# Altium PCB PCB.PcbDoc
Units mil, origin at the board's own origin, x right, y up, seen from the top; angles counter-clockwise.
Board outline 3900 x 3000 mil, 2 copper layers (Top Layer, Bottom Layer); 85 components, 48 nets, 245 pads, 30 vias.
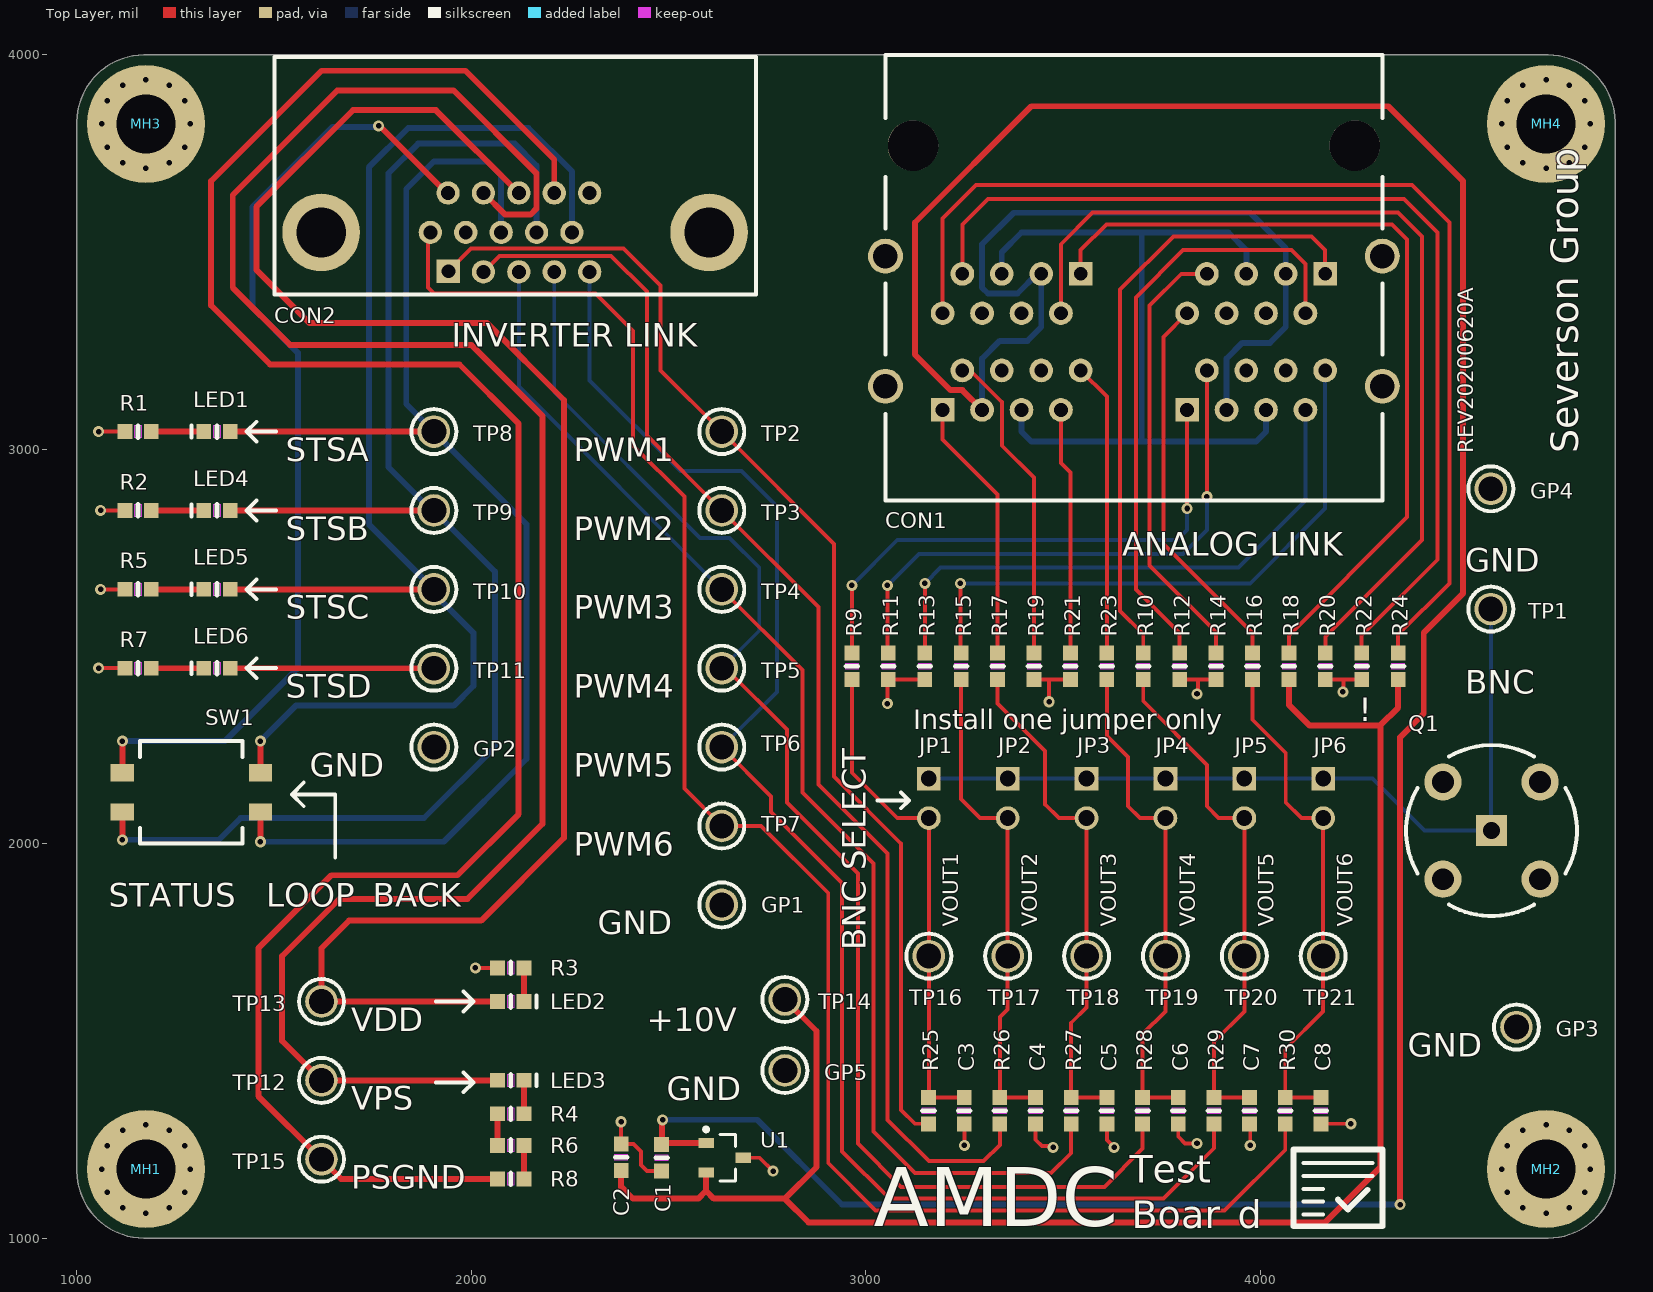
[diagram p0: Top Layer view]
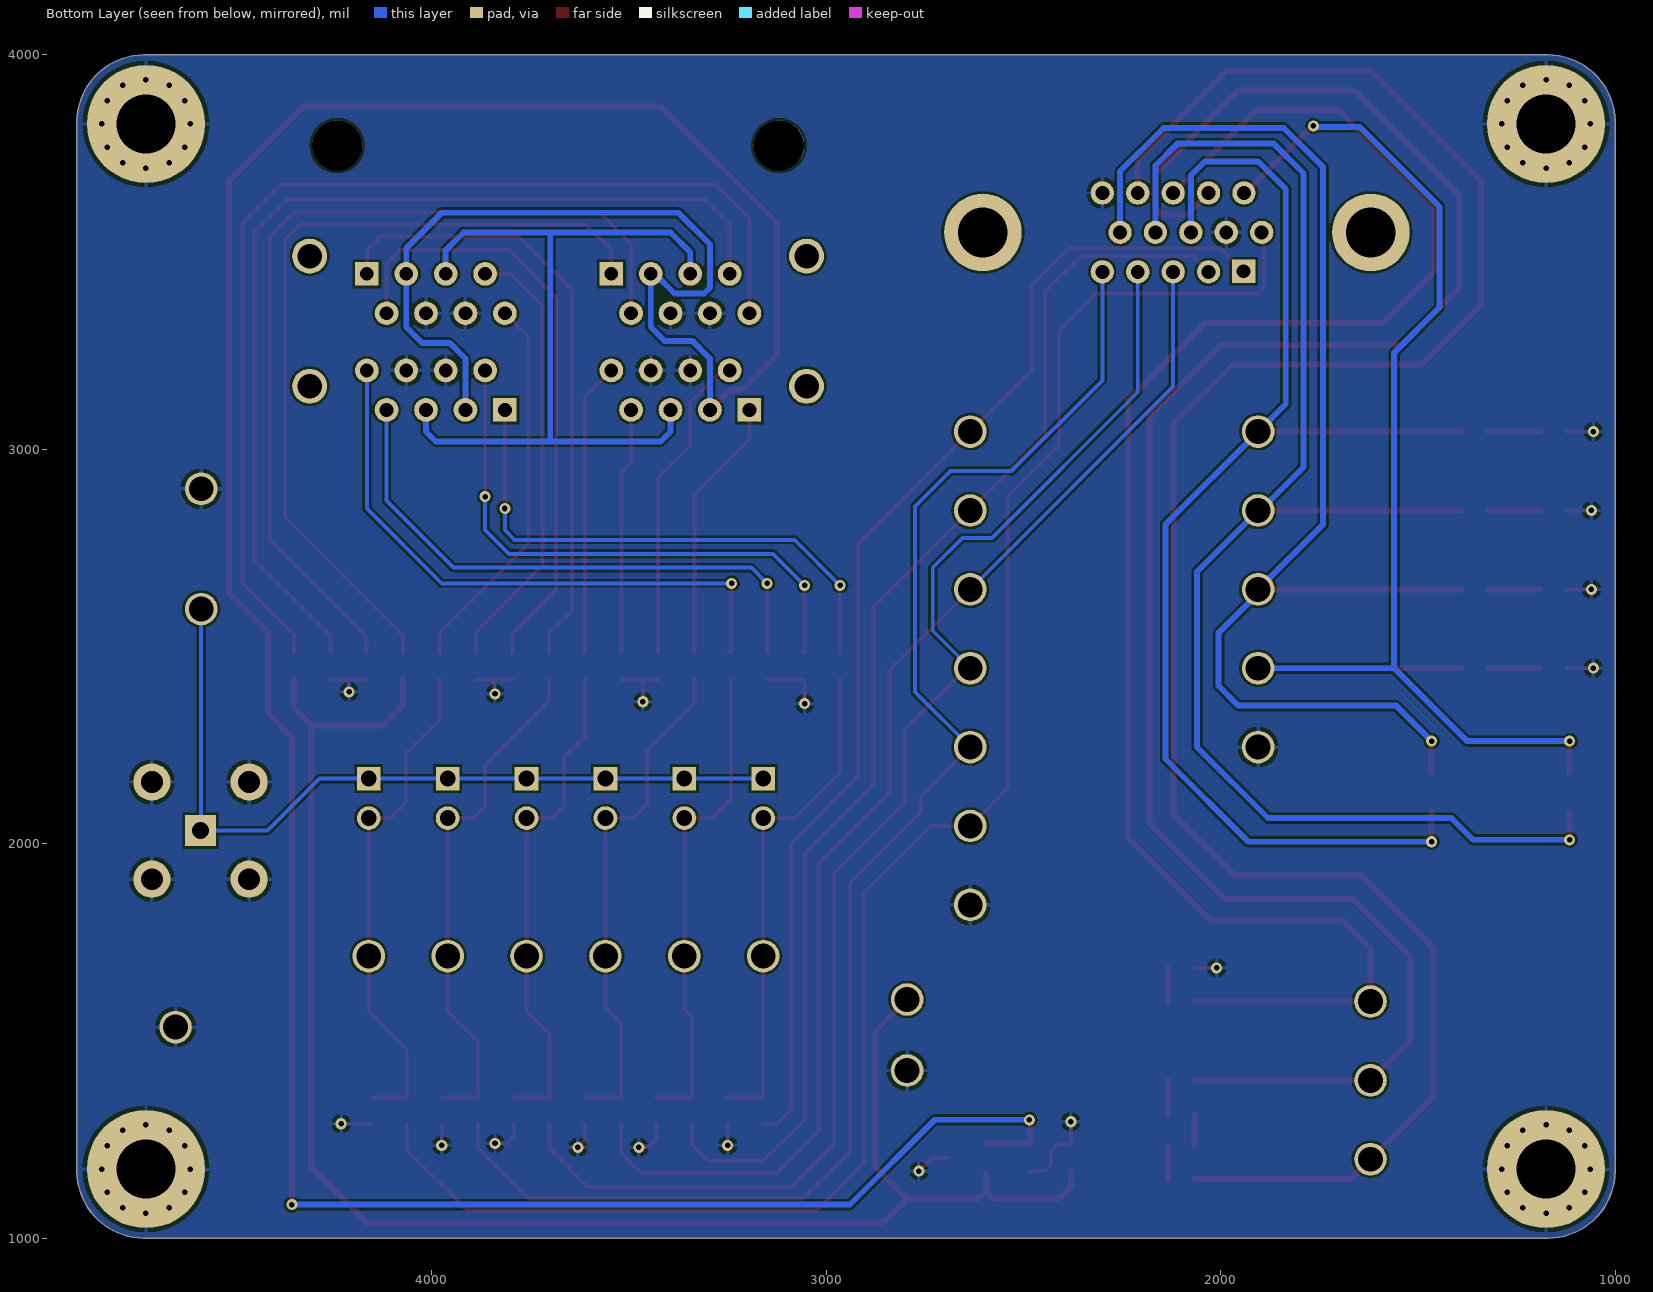
[diagram p1: Bottom Layer view, seen from below]
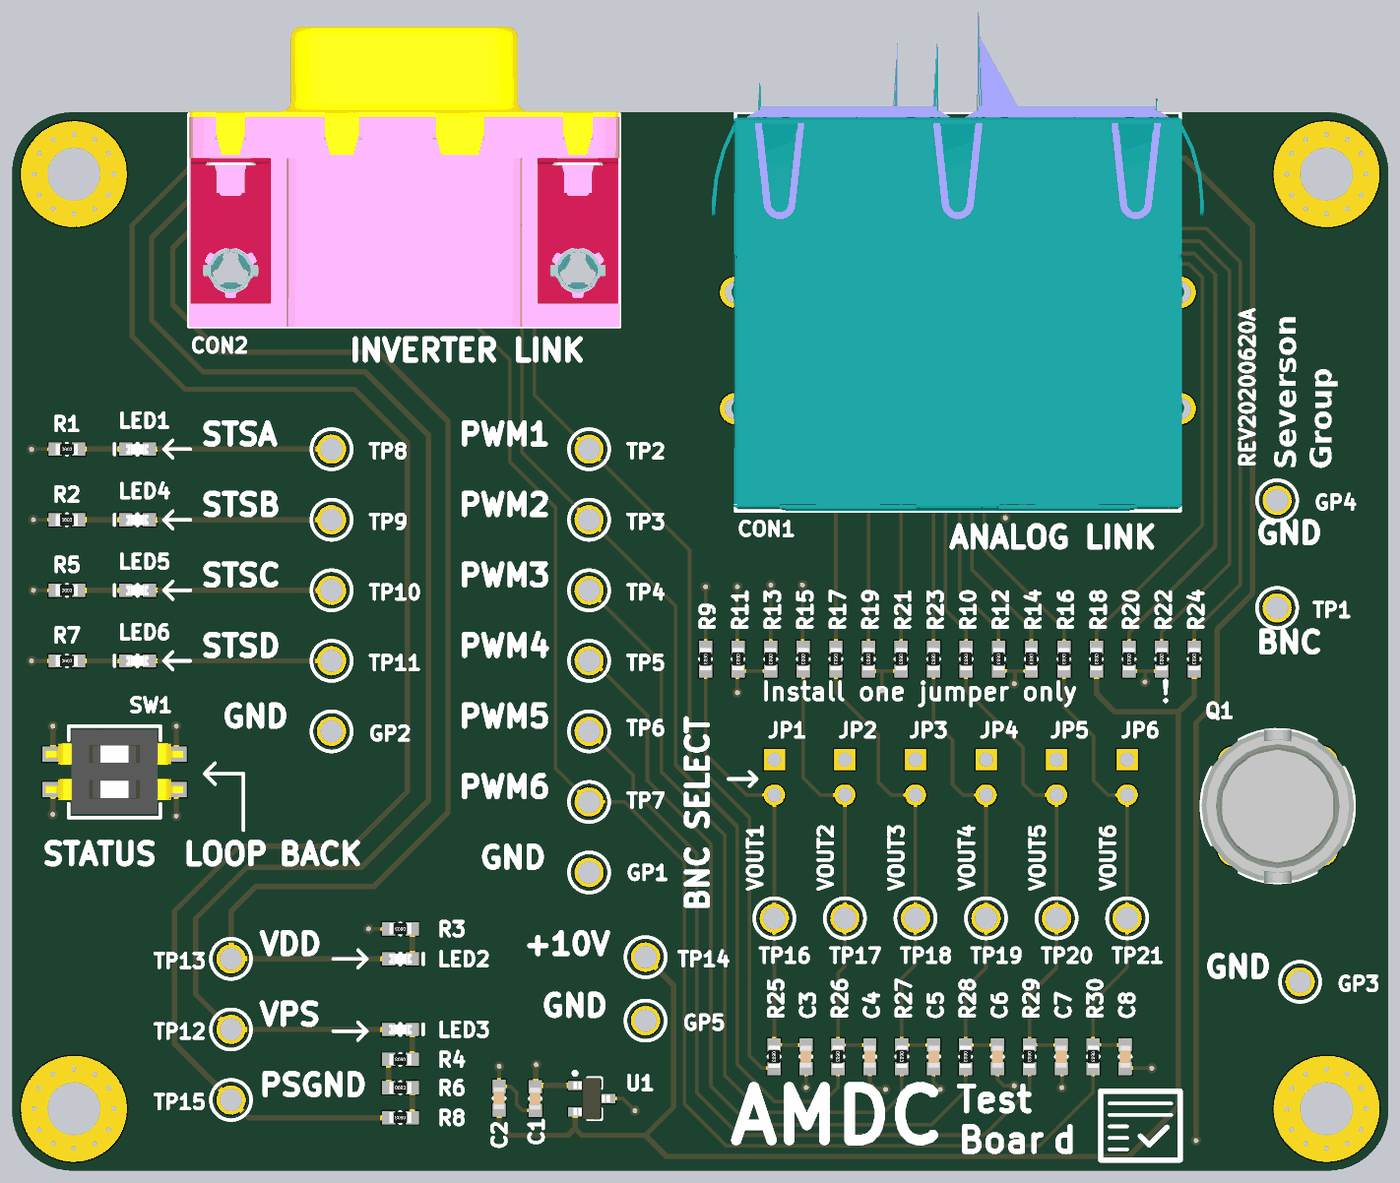
[diagram p2: 3D render of the assembled board from above, using the file's embedded part models]

## Layer stack, top to bottom
Top Solder: solder mask 0.4, Solder Resist, Dk 3.5
Top Layer: signal copper 1.4
Dielectric 1: dielectric 12.6, FR-4, Dk 4.8
Bottom Layer: signal copper 1.4
Bottom Solder: solder mask 0.4, Solder Resist, Dk 3.5

## Board outline
1000,1170 ccw(c1170,1170) 1170,1000 4730,1000 ccw(c4730,1170) 4900,1170 4900,3830 ccw(c4730,3830) 4730,4000 1170,4000 ccw(c1170,3830) 1000,3830

## Design rules (kind name [scope] priority, off if disabled: settings)
Clearance [All] p1: gap=6 ignorepadtopadclearanceinfootprint=FALSE
Height [All] p1: minheight=0 maxheight=2000 prefheight=500
HoleSize [All] p1: absolutevalues=TRUE maxlimit=250 minlimit=14 maxpercent=80.000 minpercent=20.000
PolygonConnect [All] p1: connectstyle=Relief reliefconductorwidth=10 reliefentries=4 polygonreliefangle="90 Angle" airgapwidth=10
RoutingVias [All] p1: holewidth=14 width=28 viastyle="Through Hole" minholewidth=14 minwidth=28 maxholewidth=20 maxwidth=50
SilkToSolderMaskClearance [IsPad] p1: minsilkscreentomaskgap=6 clearancetoexposedcopper=TRUE
SolderMaskExpansion [All] p1: expansion=4
Width [All] p1: maxlimit=200 minlimit=6 preferedwidth=10
27 further rules are at their usual default settings.

## Components (designator, comment, footprint, x,y, rotation, side; value= is the part's Value field where it differs from the comment)
C1 "Capacitor" 0603-CAP 2482.44,1203.8 r270 top value=100n
C2 "Capacitor" 0603-CAP 2380,1205 r90 top value=100n
C3 "Capacitor" 0603-CAP 3249.71,1322.87 r270 top value=100n
C4 "Capacitor" 0603-CAP 3430.62,1322.87 r270 top value=100n
C5 "Capacitor" 0603-CAP 3611.52,1322.87 r270 top value=100n
C6 "Capacitor" 0603-CAP 3792.43,1322.87 r270 top value=100n
C7 "Capacitor" 0603-CAP 3973.34,1322.87 r270 top value=100n
C8 "Capacitor" 0603-CAP 4154.25,1322.87 r270 top value=100n
CON1 "RJSAE538004" RJSAE538004 4240,3770 r180 top locked
CON2 "ICD15S13E6GX00LF" ICD15S13E6GX00LF 2111.22,3550 r180 top locked
GP1 "Test Point" TP_1.6MM 2635,1845 r0 top
GP2 "Test Point" TP_1.6MM 1905,2245 r0 top
GP3 "Test Point" TP_1.6MM 4650,1535 r0 top
GP4 "Test Point" TP_1.6MM 4585,2900 r0 top
GP5 "Test Point" TP_1.6MM 2795,1425 r0 top
JP1 "Jumper2" PIN_HEADER_1x2 3160,2115 r270 top
JP2 "Jumper2" PIN_HEADER_1x2 3360,2115 r270 top
JP3 "Jumper2" PIN_HEADER_1x2 3560,2115 r270 top
JP4 "Jumper2" PIN_HEADER_1x2 3760,2115 r270 top
JP5 "Jumper2" PIN_HEADER_1x2 3960,2115 r270 top
JP6 "Jumper2" PIN_HEADER_1x2 4160,2115 r270 top
LED1 "LED" 0603-LED 1355,3045 r0 top value=RED
LED2 "LED" 0603-LED 2100,1600 r180 top value=GREEN
LED3 "LED" 0603-LED 2100,1400 r180 top value=RED
LED4 "LED" 0603-LED 1355,2845 r0 top value=GREEN
LED5 "LED" 0603-LED 1355,2645 r0 top value=YELLOW
LED6 "LED" 0603-LED 1355,2445 r0 top value=BLUE
MH1 "MOUNT_HOLE" MOUNTING_HOLE 1175,1175 r0 top locked
MH2 "MOUNT_HOLE" MOUNTING_HOLE 4725,1175 r0 top locked
MH3 "MOUNT_HOLE" MOUNTING_HOLE 1175,3825 r0 top locked
MH4 "MOUNT_HOLE" MOUNTING_HOLE 4725,3825 r0 top locked
Q1 "5-1634503-1" 5-1634503-1 4586.77,2033.23 r0 top
R1 "Resistor" 0603-RES 1155,3045 r0 top value=470
R2 "Resistor" 0603-RES 1155,2845 r0 top value=470
R3 "Resistor" 0603-RES 2100,1685 r180 top value=470
R4 "Resistor" 0603-RES 2100,1315 r180 top value=470
R5 "Resistor" 0603-RES 1155,2645 r0 top value=470
R6 "Resistor" 0603-RES 2100,1235 r0 top value=470
R7 "Resistor" 0603-RES 1155,2445 r0 top value=470
R8 "Resistor" 0603-RES 2100,1150 r180 top value=470
R9 "Resistor" 0603-RES 2965,2450 r270 top value=0R
R10 "Resistor" 0603-RES 3703.67,2450 r270 top value=0R
R11 "Resistor" 0603-RES 3057.33,2450 r270 top value=0R
R12 "Resistor" 0603-RES 3796,2450 r270 top value=0R
R13 "Resistor" 0603-RES 3149.67,2450 r270 top value=0R
R14 "Resistor" 0603-RES 3888.33,2450 r270 top value=0R
R15 "Resistor" 0603-RES 3242,2450 r270 top value=0R
R16 "Resistor" 0603-RES 3980.67,2450 r270 top value=0R
R17 "Resistor" 0603-RES 3334.33,2450 r270 top value=0R
R18 "Resistor" 0603-RES 4073,2450 r270 top value=0R
R19 "Resistor" 0603-RES 3426.67,2450 r270 top value=0R
R20 "Resistor" 0603-RES 4165.33,2450 r270 top value=0R
R21 "Resistor" 0603-RES 3519,2450 r270 top value=0R
R22 "Resistor" 0603-RES 4257.67,2450 r270 top value=0R
R23 "Resistor" 0603-RES 3611.33,2450 r270 top value=0R
R24 "Resistor" 0603-RES 4350,2450 r270 top value=0R
R25 "Resistor" 0603-RES 3159.25,1322.87 r270 top value=160
R26 "Resistor" 0603-RES 3340.16,1322.87 r270 top value=160
R27 "Resistor" 0603-RES 3521.07,1322.87 r270 top value=160
R28 "Resistor" 0603-RES 3701.98,1322.87 r270 top value=160
R29 "Resistor" 0603-RES 3882.89,1322.87 r270 top value=160
R30 "Resistor" 0603-RES 4063.8,1322.87 r270 top value=160
SW1 "DS04-254-2-02BK-SMT" DS04-254-2-02BK-SMT 1290,2130 r90 top
TP1 "Test Point" TP_1.6MM 4585,2595 r0 top
TP2 "Test Point" TP_1.6MM 2635,3045 r0 top
TP3 "Test Point" TP_1.6MM 2635,2845 r0 top
TP4 "Test Point" TP_1.6MM 2635,2645 r0 top
TP5 "Test Point" TP_1.6MM 2635,2445 r0 top
TP6 "Test Point" TP_1.6MM 2635,2245 r0 top
TP7 "Test Point" TP_1.6MM 2635,2045 r0 top
TP8 "Test Point" TP_1.6MM 1905,3045 r0 top
TP9 "Test Point" TP_1.6MM 1905,2845 r0 top
TP10 "Test Point" TP_1.6MM 1905,2645 r0 top
TP11 "Test Point" TP_1.6MM 1905,2445 r0 top
TP12 "Test Point" TP_1.6MM 1620,1400 r0 top
TP13 "Test Point" TP_1.6MM 1620,1600 r0 top
TP14 "Test Point" TP_1.6MM 2795,1605 r0 top
TP15 "Test Point" TP_1.6MM 1620,1200 r0 top
TP16 "Test Point" TP_1.6MM 3160,1715 r0 top
TP17 "Test Point" TP_1.6MM 3360,1715 r0 top
TP18 "Test Point" TP_1.6MM 3560,1715 r0 top
TP19 "Test Point" TP_1.6MM 3760,1715 r0 top
TP20 "Test Point" TP_1.6MM 3960,1715 r0 top
TP21 "Test Point" TP_1.6MM 4160,1715 r0 top
U1 "LT1460KCS3-10#TRMPBF" SOT95P237X112-3N 2642.44,1203.8 r0 top

## Footprints (in the part's own frame and the unit in brackets; to place one, negate y for a bottom-side part, rotate by r counter-clockwise, add the part's x,y. Pads: shape width x height; smd on the part's side, far side on the other; paste and mask are expansions set on the pad)
5-1634503-1 [mm] "CONN BNC JACK STR 50 OHM PCB"
  rect 2x2 hole 1.1: 1(0,0)
  round 2.4 hole 1.4: 2(-3.13,-3.13) 2(-3.13,3.13) 2(3.13,-3.13) 2(3.13,3.13)
  silkscreen extent -5.5,-5.5 5.5,5.5, body extent -5.5,-5.51 5.5,5.51, height 13.7
0603-CAP [mm]
  rect 0.95x0.95 smd: 1(-0.85,0) 2(0.85,0)
  Top Layer keep-out region: -0.2,0.4 0.2,0.4 0.2,-0.4 -0.2,-0.4
  silkscreen extent 0,-0.38 0,0.38, body extent -0.8,-0.4 0.8,0.4, height 0.79
0603-LED [mm]
  rect 0.95x0.95 smd: A(0.85,0) C(-0.85,0)
  Top Layer keep-out region: -0.2,0.4 0.2,0.4 0.2,-0.4 -0.2,-0.4
  silkscreen extent -1.65,-0.38 0,0.38, body extent -0.83,-0.37 0.82,0.81, height 0.8
0603-RES [mm]
  rect 0.95x0.95 smd: 1(-0.85,0) 2(0.85,0)
  Top Layer keep-out region: -0.2,0.4 0.2,0.4 0.2,-0.4 -0.2,-0.4
  silkscreen extent 0,-0.38 0,0.38, body extent -0.8,-0.4 0.8,0.4, height 0.44
DS04-254-2-02BK-SMT [mm] "DIP SWITCH, SPST, 2.54 PITCH, FL"
  rect 1.1x1.5 smd: 1(-1.27,-4.45) 2(-1.27,4.45) 3(1.27,-4.45) 4(1.27,4.45)
  silkscreen extent -3.3,-3.3 3.3,3.3, body extent -3.03,-4.95 3.05,4.95, height 3.99
ICD15S13E6GX00LF [mm] "CONN DSUB HD RCPT 15POS R/A SLDR"
  rect 1.5x1.5 hole 0.9: 1(4.305,2.5)
  round 1.5 hole 0.9: 2(2.045,2.54) 3(-0.235,2.54) 4(-2.515,2.54) 5(-4.795,2.54) 6(5.465,0) 7(3.185,0) 8(0.905,0) 9(-1.375,0) 10(-3.655,0) 11(4.325,-2.54) 12(2.045,-2.54) 13(-0.235,-2.54) 14(-2.515,-2.54) 15(-4.795,-2.54)
  round 5 hole 3.2: SH1(12.495,0) SH2(-12.495,0)
  silkscreen extent -15.5,-11.3 15.5,4, body extent -15.5,-17.58 15.5,4, height 12.65
MOUNTING_HOLE [mil]
  round 30 hole 14: 1(-112.5,0) 1(-98.43,-59.06) 1(-98.43,59.06) 1(-59.06,-98.43) 1(-59.06,98.43) 1(0,-112.5) 1(0,112.5) 1(59.06,-98.43) 1(59.06,98.43) 1(98.43,-59.06) 1(98.43,59.06) 1(112.5,0)
  round 300 hole 150: 1(0,0)
PIN_HEADER_1x2 [mil]
  rect 60x60 hole 40.16: 1(-50,0)
  round 60 hole 40.16: 2(50,0)
RJSAE538004 [mil] "CONN MOD JACK 8P8C R/A SHIELDED"
  rect 60x60 hole 35: 1A(425,670) 1B(1045,670) 1C(75,325) 1D(695,325)
  round 60 hole 35: 2A(375,570) 2B(995,570) 2C(125,425) 2D(745,425) 3A(325,670) 3B(945,670) 3C(175,325) 3D(795,325) 4A(275,570) 4B(895,570) 4C(225,425) 4D(845,425) 5A(225,670) 5B(845,670) 5C(275,325) 5D(895,325) 6A(175,570) 6B(795,570) 6C(325,425) 6D(945,425) 7A(125,670) 7B(745,670) 7C(375,325) 7D(995,325) 8A(75,570) 8B(695,570) 8C(425,425) 8D(1045,425)
  round 88.58 hole 62: SH1(-70,610) SH2(-70,280) SH3(1190,610) SH4(1190,280)
  round 127.95 hole 128: ""(0,0) ""(1120,0)
  silkscreen extent -70,-230 1190,900, body extent -137,-450 1257,900, height 1094
SOT95P237X112-3N [mm] "SOT23, 3-Leads, Body 2.92x2.37mm, Pitch 0.95mm, IPC Medium Density"
  rect 1x0.65 smd: 1(-1.2,0.95) 2(-1.2,-0.95) 3(1.2,0)
  silkscreen extent -1.32,-1.5 0.7,1.95, body extent -1.32,-1.52 1.32,1.52, height 1.12
TP_1.6MM [mm]
  round 2.1 hole 1.6: 1(0,0)
  silkscreen extent -1.45,-1.45 1.45,1.45, body extent -1.52,-1.51 1.52,1.53, height 5

## Part data
C1 C2 C3 C4 C5 C6 C7 C8: Supplier Part Number 1=311-1341-1-ND, Supplier 1=Digi-Key
CON1: "CONN MOD JACK 8P8C R/A SHIELDED", Supplier Part Number 1=RJSAE538004-ND, Supplier 1=Digi-Key
CON2: "CONN DSUB HD RCPT 15POS R/A SLDR", Supplier Part Number 1=609-2801-ND, Supplier 1=Digi-Key
GP1 GP2 GP3 GP4 GP5 TP1 TP2 TP3 TP4 TP5 TP6 TP7 TP8 TP9 TP10 TP11 TP12 TP13 TP14 TP15 TP16 TP17 TP18 TP19 TP20 TP21: Supplier Part Number 1=36-5005-ND, Supplier 1=Digi-Key
JP1 JP2 JP3 JP4 JP5 JP6: Supplier Part Number 1=732-5315-ND, Supplier 1=Digi-Key
LED1 LED3: Supplier Part Number 1=732-4978-1-ND, Supplier 1=Digi-Key
LED2 LED4: Supplier Part Number 1=732-4980-1-ND, Supplier 1=Digi-Key
LED5: Supplier Part Number 1=732-4981-1-ND, Supplier 1=Digi-Key
LED6: Supplier Part Number 1=732-4966-1-ND, Supplier 1=Digi-Key
MH1 MH2 MH3 MH4: "MOUNTING HOLE"
Q1: "CONN BNC JACK STR 50 OHM PCB", Supplier Part Number 1=A97581-ND, Supplier 1=Digi-Key
R1 R2 R3 R4 R5 R6 R7 R8: Supplier Part Number 1=311-470GRCT-ND, Supplier 1=Digi-Key
R9 R10 R11 R12 R13 R14 R15 R16 R17 R18 R19 R20 R21 R22 R23 R24: Supplier Part Number 1=311-0.0GRCT-ND, Supplier 1=Digi-Key
R25 R26 R27 R28 R29 R30: Supplier Part Number 1=311-160HRCT-ND, Supplier 1=Digi-Key
SW1: "DIP SWITCH, SPST, 2.54 PITCH, FL", Supplier Part Number 1=2223-DS04-254-2-02BK-SMT-ND, Supplier 1=Digi-Key
U1: "IC VREF SERIES 0.5% SOT23-3", Supplier Part Number 1=LT1460KCS3-10#TRMPBFCT-ND, Supplier 1=Digi-Key

## Via types
v1: diameter 28, hole 14, Top Layer to Bottom Layer, tented both sides, 30 vias

## Nets (pads, with @x,y where several pads share a name; then routed paths per layer and width w, separated by ;. In a path a pad name is that pad's centre, name@x,y a point inside that pad or via, vN(x,y) a via of type N, cw(c..) or ccw(c..) an arc to the next point about the centre after c; other vN are vias at no path point)
10V: C2.1 R18.2 R24.2 TP14.1 U1.2 | length 4269.3
  Top Layer w15: C2.1 2380,1130 2410,1100 2575.39,1100 2595.2,1119.8 ; U1.2 2595.2,1119.8 ; TP14.1 2875,1525 2875,1180 2795,1100 ; R18.2 4073,2352 4125,2300 4305,2300 ; R24.2 4350,2345 4305,2300 ; 2595.2,1119.8 2615,1100 2795,1100 ; 2795,1100 2855,1040 4165,1040 4305,1180 4305,2300
+15V: C1.1 CON1.3A CON1.3B CON1.3C CON1.3D U1.1 | length 9039.2
  Top Layer w15: C1.1 C1.1@2483.72,1238.54 ; v1(2485,1300) 2483.72,1298.72 C1.1@2483.72,1238.54 ; U1.1 2486.38,1241.2 C1.1@2483.72,1238.54 ; CON1.3B 3245,3150 3215,3150 3125,3240 3125,3575 3420,3870 4325,3870 4515,3680 4515,2635 4415,2535 4415,2330 4355,2270 v1(4355,1085)
  Bottom Layer w15: v1(2485,1300) 2725,1300 2940,1085 v1(4355,1085) ; CON1.3B 3295,3230 3340,3275 3410,3275 3445,3310 CON1.3D 3435,3445 3385,3395 3310,3395 3295,3410 3295,3520 3375,3600 3975,3600 4065,3510 CON1.3C 4065,3310 4025,3270 3955,3270 3915,3230 CON1.3A
-15V: CON1.5A CON1.5B CON1.5C CON1.5D | length 2057.1
  Bottom Layer w15: CON1.5D 3345,3500 3395,3550 3700,3550 ; CON1.5B 3395,3045 3420,3020 3705,3020 ; CON1.5C 3965,3505 3920,3550 3700,3550 ; CON1.5A 4015,3045 3990,3020 3705,3020 ; 3700,3550 3700,3025 3705,3020
ANLG_N1: CON1.2A R11.1 | length 1447.7
  Top Layer w10: v1(3055,2655) 3055,2491.13 3060,2486.13 R11.1 ; v1(3865,2880) CON1.2A
  Bottom Layer w10: v1(3055,2655) 3135,2735 3805,2735 3865,2795 v1(3865,2880)
ANLG_N2: CON1.8A R15.1 | length 1533.5
  Top Layer w10: v1(3240,2660) 3240,2491.46 3245,2486.46 R15.1
  Bottom Layer w10: v1(3240,2660) 3975,2660 4165,2850 CON1.8A
ANLG_N3: CON1.2B R19.1 | length 803.5
  Top Layer w10: CON1.2B 3265,3200 3345,3120 3345,3010 3426.67,2928.33 R19.1
ANLG_N4: CON1.8B R23.1 | length 744
  Top Layer w10: CON1.8B 3611.33,3133.67 R23.1
ANLG_N5: CON1.2C R12.1 | length 1566.7
  Top Layer w10: R12.1 3796,2534 3685,2645 3685,3385 3805,3505 4080,3505 4115,3470 CON1.2C
ANLG_N6: CON1.8C R16.1 | length 979.9
  Top Layer w10: CON1.8C 3755,3285 3755,2760 3980.67,2534.33 R16.1
ANLG_N7: CON1.2D R20.1 | length 2305.9
  Top Layer w10: CON1.2D 3495,3520 3575,3600 4350,3600 4410,3540 4410,2770 4165.33,2525.33 R20.1
ANLG_N8: CON1.8D R24.1 | length 2744.9
  Top Layer w10: CON1.8D 3195,3585 3280,3670 4385,3670 4480,3575 4480,2660 4350,2530 R24.1
ANLG_P1: CON1.1A R9.1 | length 1384.5
  Top Layer w10: R9.1 v1(2965,2655) ; v1(3815,2850) CON1.1A
  Bottom Layer w10: v1(2965,2655) 3080,2770 3790,2770 3815,2795 v1(3815,2850)
ANLG_P2: CON1.7A R13.1 | length 1458.7
  Top Layer w10: R13.1 3150,2483.8 v1(3150,2660)
  Bottom Layer w10: v1(3150,2660) 3190,2700 3945,2700 4115,2870 CON1.7A
ANLG_P3: CON1.1B R17.1 | length 674.2
  Top Layer w10: CON1.1B 3195,3025 3334.33,2885.67 R17.1
ANLG_P4: CON1.7B R21.1 | length 626.5
  Top Layer w10: CON1.7B 3495,2965 3519,2941 R21.1
ANLG_P5: CON1.1C R10.1 | length 1596.3
  Top Layer w10: R10.1 3703.67,2531.33 3645,2590 3645,3405 3780,3540 4130,3540 4165,3505 CON1.1C
ANLG_P6: CON1.7C R14.1 | length 1129.4
  Top Layer w10: CON1.7C 3800,3445 3720,3365 3720,2705 3888.33,2536.67 R14.1
ANLG_P7: CON1.1D R18.1 | length 2103.5
  Top Layer w10: CON1.1D 3545,3505 3610,3570 4335,3570 4373,3532 4373,2828 4073,2528 R18.1
ANLG_P8: CON1.7D R22.1 | length 2538.3
  Top Layer w10: CON1.7D 3245,3570 3310,3635 4365,3635 4450,3550 4450,2720 4257.67,2527.67 R22.1
BNC: JP1.1 JP2.1 JP3.1 JP4.1 JP5.1 JP6.1 Q1.1 TP1.1 | length 2043.9
  Bottom Layer w10: JP1.1 JP2.1 JP3.1 JP4.1 JP5.1 JP6.1 4285,2165 4416.77,2033.23 Q1.1 4585,2035 TP1.1
GND: C1.2 C2.2 C3.2 C4.2 C5.2 C6.2 C7.2 C8.2 CON1.4A CON1.4B CON1.4C CON1.4D CON1.6A CON1.6B CON1.6C CON1.6D CON2.7 CON2.15 GP1.1 GP2.1 GP3.1 GP4.1 GP5.1 MH1.1 MH2.1 MH3.1 MH4.1 Q1.2 R1.1 R2.1 R3.2 R5.1 R7.1 R11.2 R12.2 R13.2 R14.2 R19.2 R20.2 R21.2 R22.2 U1.3 | length 1607.6
  Top Layer w10: v1(1055,2445) R7.1 ; v1(1055,3045) R1.1 ; v1(1060,2645) R5.1 ; v1(1060,2845) R2.1 ; v1(2010,1685) R3.2 ; v1(2380,1295) C2.2 2411.54,1238.46 2430,1220 2430,1185.86 2445.52,1170.33 C1.2 C1.2@2480,1167.89 ; U1.3 2731.2,1203.8 v1(2765,1170) ; v1(3055,2355) 3055,2414.2 R11.2 R13.2 ; C3.2 3250,1289.12 v1(3250,1235) ; R19.2@3425,2414.87 R19.2 3465,2416.54 ; C4.2 3430.62,1249.38 3446.56,1233.44 3471.56,1233.44 v1(3475,1230) ; v1(3465,2360) 3465,2416.54 ; R21.2 3465,2416.54 ; C5.2 3611.52,1248.48 v1(3630,1230) ; C6.2 3792.43,1257.57 3810,1240 v1(3840,1240) ; R12.2 3842.17,2416.54 ; v1(3840,2380) 3842.17,2382.17 3842.17,2416.54 ; R14.2@3890,2414.87 R14.2 3842.17,2416.54 ; C7.2 3975,1287.75 v1(3975,1235) ; C8.2 4154.84,1290 v1(4230,1290) ; R20.2@4165,2416.2 R20.2 4211.5,2416.54 ; v1(4210,2385) 4211.5,2386.5 4211.5,2416.54 ; R22.2 4211.5,2416.54
NetLED1_C: LED1.C R1.2 | length 133.1
  Top Layer w15: R1.2 LED1.C
NetLED2_C: LED2.C R3.1 | length 85
  Top Layer w15: LED2.C R3.1
NetLED3_C: LED3.C R4.1 | length 85
  Top Layer w15: R4.1 LED3.C
NetLED4_C: LED4.C R2.2 | length 133.1
  Top Layer w15: R2.2 LED4.C
NetLED5_C: LED5.C R5.2 | length 133.1
  Top Layer w15: R5.2 LED5.C
NetLED6_C: LED6.C R7.2 | length 133.1
  Top Layer w15: R7.2 LED6.C
NetR4_2: R4.2 R6.1 | length 80
  Top Layer w15: R6.1 R4.2
NetR6_2: R6.2 R8.1 | length 85
  Top Layer w15: R8.1 R6.2
PSGND: CON2.14 R8.2 TP15.1 | length 5242.9
  Top Layer w15: R8.2 1670,1150 TP15.1 1460,1360 1460,1735 1645,1920 1965,1920 2120,2075 2120,3065 1970,3215 1490,3215 1340,3365 1340,3680 1620,3960 1985,3960 2210.24,3734.76 CON2.14
PWM1: CON2.1 R25.2 TP2.1 | length 3028
  Top Layer w10: CON2.1 1999.63,3509.47 2385.53,3509.47 2480,3415 2480,3200 TP2.1 2920,2760 2920,2170 3090,2000 3090,1325 3125,1290 3158.66,1290 R25.2
PWM2: CON2.2 R26.2 TP3.1 | length 3220.3
  Top Layer w10: CON2.2 2071.24,3490.53 2354.47,3490.53 2445,3400 2445,3035 TP3.1 2880,2600 2880,2150 3055,1975 3055,1300 3160,1195 3299.14,1195 3340.16,1236.02 R26.2
PWM3: CON2.3 R27.2 TP4.1 | length 3191.7
  Top Layer w10: TP4.1 2840,2440 2840,2130 3020,1950 3020,1270 3125,1165 3470,1165 3521.07,1216.07 R27.2
  Bottom Layer w10: CON2.3 2120.47,3159.53 TP4.1
PWM4: CON2.4 R28.2 TP5.1 | length 3527.6
  Top Layer w10: CON2.4@2210.12,3449.88 CON2.4 ; TP5.1 2645,2445 2800,2290 2800,2105 2980,1925 2980,1240 3090,1130 3605,1130 3701.98,1226.98 R28.2
  Bottom Layer w10: CON2.4 2210.24,3144.76 2580,2775 2655,2775 2730,2700 2730,2540 TP5.1
PWM5: CON2.5 R29.2 TP6.1 | length 3809
  Top Layer w10: TP6.1 2760,2120 2760,2080 2940,1900 2940,1220 3060,1100 3755,1100 3882.89,1227.89 R29.2
  Bottom Layer w10: CON2.5 2300,3175 2530,2945 2685,2945 2775,2855 2775,2385 TP6.1
PWM6: CON2.6 R30.2 TP7.1 | length 4419.5
  Top Layer w10: CON2.6 1890,3543.94 1890,3410 1905,3395 2315,3395 2410,3300 2410,3010 2540,2880 2540,2140 TP7.1 2735,2045 2905,1875 2905,1190 3025,1070 3910,1070 4063.8,1223.8 R30.2
STSA: CON2.8 LED1.A SW1.1 TP8.1 | length 3353.7
  Top Layer w15: LED1.A TP8.1 ; v1(1465,2005) 1465,2079.8 SW1.1
  Bottom Layer w15: v1(1465,2005) 1930,2005 2140,2215 2140,2810 TP8.1 1835,3115 1835,3660 1905,3730 2040,3730 2075.59,3694.41 CON2.8
STSB: CON2.9 LED4.A SW1.2 TP9.1 | length 3797.7
  Top Layer w15: SW1.2 1115,2079.8 v1(1115,2010) ; LED4.A TP9.1
  Bottom Layer w15: v1(1115,2010) 1360,2010 1415,2065 1880,2065 2060,2245 2060,2690 TP9.1 1900,2845 1790,2955 1790,3700 1865,3775 2110,3775 2165.35,3719.65 CON2.9
STSC: CON2.10 LED5.A SW1.3 TP10.1 | length 3376.4
  Top Layer w15: LED5.A TP10.1 ; v1(1465,2260) 1465,2180.2 SW1.3
  Bottom Layer w15: v1(1465,2260) 1555,2350 1955,2350 2005,2400 2005,2535 1905,2635 TP10.1 1740,2810 1740,3715 1840,3815 2145,3815 2255.12,3704.88 CON2.10
STSD: CON2.11 LED6.A SW1.4 TP11.1 | length 3332.2
  Top Layer w15: SW1.4 1115,2180.2 v1(1115,2260) ; LED6.A TP11.1 ; v1(1765,3820) 1767.97,3820 1937.97,3650 CON2.11
  Bottom Layer w15: v1(1115,2260) 1375,2260 1560,2445 ; v1(1765,3820) 1762.51,3817.51 1647.51,3817.51 1445,3615 1445,3360 1560,3245 1560,2445 ; TP11.1 1560,2445
VDD: CON2.13 LED2.A TP13.1 | length 4353.1
  Top Layer w15: LED2.A TP13.1 1620,1735 1690,1805 2025,1805 2235,2015 2235,3125 2040,3320 1590,3320 1455,3455 1455,3615 1700,3860 1910,3860 2120,3650 CON2.13
VOUT1: C3.1 JP1.2 R9.2 R25.1 TP16.1 | length 1278.6
  Top Layer w10: R9.2 2965,2180 3080,2065 JP1.2 TP16.1 3160,1357.09 R25.1 C3.1
VOUT2: C4.1 JP2.2 R15.2 R26.1 TP17.1 | length 1248.8
  Top Layer w10: R15.2 3242,2113 3290,2065 JP2.2 TP17.1 3360,1580 3340.16,1560.16 R26.1 C4.1
VOUT3: C5.1 JP3.2 R17.2 R27.1 TP18.1 | length 1301.3
  Top Layer w10: R17.2 3334.33,2355.67 3455,2235 3455,2100 3490,2065 JP3.2 TP18.1 3560,1585 3521.07,1546.07 R27.1 C5.1
VOUT4: C6.1 JP4.2 R23.2 R28.1 TP19.1 | length 1274.3
  Top Layer w10: R23.2 3611.33,2273.67 3665,2220 3665,2095 3695,2065 JP4.2 TP19.1 3760,1575 3701.98,1516.98 R28.1 C6.1
VOUT5: C7.1 JP5.2 R10.2 R29.1 TP20.1 | length 1326.8
  Top Layer w10: R10.2 3703.67,2361.33 3865,2200 3865,2095 3895,2065 JP5.2 TP20.1 3960,1575 3882.89,1497.89 R29.1 C7.1
VOUT6: C8.1 JP6.2 R16.2 R30.1 TP21.1 | length 1297
  Top Layer w10: R16.2 3980.67,2314.33 4065,2230 4065,2105 4105,2065 JP6.2 TP21.1 4160,1575 4063.8,1478.8 R30.1 C8.1
VPS: CON2.12 LED3.A TP12.1 | length 5011.4
  Top Layer w15: CON2.12 2085.71,3595 2150,3595 2165,3610 2165,3700 1955,3910 1660,3910 1395,3645 1395,3410 1540,3265 2000,3265 2180,3085 2180,2050 1990,1860 1665,1860 1520,1715 1520,1500 TP12.1 LED3.A
pads on no net: CON1. CON1.SH1 CON1.SH2 CON1.SH3 CON1.SH4 CON2.SH1 CON2.SH2

## Polygon pours and split planes (outlines as drawn)
GND on Bottom Layer "GND_L02_P002" (solid, pour order 2): 1000,1170 ccw(c1170,1170) 1170,1000 4730,1000 ccw(c4730,1170) 4900,1170 4900,3830 ccw(c4730,3830) 4730,4000 1170,4000 ccw(c1170,3830) 1000,3830

## Silkscreen, mask and mechanical layers (free items; w line width, h text height)
Top Overlay:
  lines w10: 1455,2420 1430,2445 ; 1455,2470 1430,2445 ; 1455,2620 1430,2645 ; 1455,2670 1430,2645 ; 1455,2820 1430,2845 ; 1455,2870 1430,2845 ; 1455,3020 1430,3045 ; 1455,3070 1430,3045 ; 1505,2445 1430,2445 ; 1505,2645 1430,2645 ; 1505,2845 1430,2845 ; 1505,3045 1430,3045 ; 1575,2095 1545,2125 ; 1575,2155 1545,2125 ; 1655,1965 1655,2125 1545,2125 ; 1910,1395 2005,1395 ; 1910,1600 2005,1600 ; 1980,1370 2005,1395 ; 1980,1420 2005,1395 ; 1980,1575 2005,1600 ; 1980,1625 2005,1600 ; 3030,2110 3110,2110 ; 3090,2090 3110,2110 ; 3090,2130 3110,2110 ; 4110,1060 4160,1060 ; 4110,1092.5 4160,1092.5 ; 4110,1125 4160,1125 ; 4110,1157.5 4285,1157.5 ; 4110,1190 4285,1190
  lines w15: 4197.5,1097.5 4222.5,1072.5 4272.5,1122.5 ; 4085,1030 4085,1225 4310,1225 4310,1030 4085,1030
  text "INVERTER LINK" at 1950,3260 h60
  text "REV20200620A" at 4540,2990 h40 r90
  text "Severson Group" at 4830,2990 h120 r90
  text "STSA" at 1530,2970 h60
  text "PWM1" at 2260,2970 h60
  text "STSB" at 1530,2770 h60
  text "PWM2" at 2260,2770 h60
  text "ANALOG LINK" at 3650,2730 h60
  text "GND" at 4520,2690 h60
  text "STSC" at 1530,2570 h60
  text "PWM3" at 2260,2570 h60
  text "BNC" at 4520,2380 h60
  text "STSD" at 1530,2370 h60
  text "PWM4" at 2260,2370 h60
  text "!" at 4250,2310 h60
  text "Install one jumper only" at 3120,2290 h50
  text "GND" at 1590,2170 h60
  text "PWM5" at 2260,2170 h60
  text "PWM6" at 2260,1970 h60
  text "STATUS" at 1080,1840 h60
  text "LOOP" at 1480,1840 h60
  text "BACK" at 1750,1840 h60
  text "VOUT1" at 3235,1790 h40 r90
  text "VOUT2" at 3435,1790 h40 r90
  text "VOUT3" at 3635,1790 h40 r90
  text "VOUT4" at 3835,1790 h40 r90
  text "VOUT5" at 4035,1790 h40 r90
  text "VOUT6" at 4235,1790 h40 r90
  text "GND" at 2320,1770 h60
  text "BNC SELECT" at 3000,1730 h60 r90
  text "VDD" at 1695,1525 h60
  text "+10V" at 2445,1525 h60
  text "GND" at 4375,1460 h60
  text "GND" at 2495,1350 h60
  text "VPS" at 1695,1325 h60
  text "Test" at 3670,1140 h70
  text "PSGND" at 1695,1125 h60
  text "AMDC" at 3020,1030 h150
  text "Boar" at 3675.08,1025 h70
  text "d" at 3943.35,1025 h70
Mechanical 1:
  the board outline again, w5